# Altium PCB PCB_all_try.PcbDoc (part 4 of 5)
Units mm, origin at the board's own origin, x right, y up, seen from the top; angles counter-clockwise.
Board outline 345 x 240 mm, 2 copper layers (Top Layer, Bottom Layer); 484 components, 419 nets, 1569 pads, 699 vias.
Unrouted connection lines stored in the file: 63.
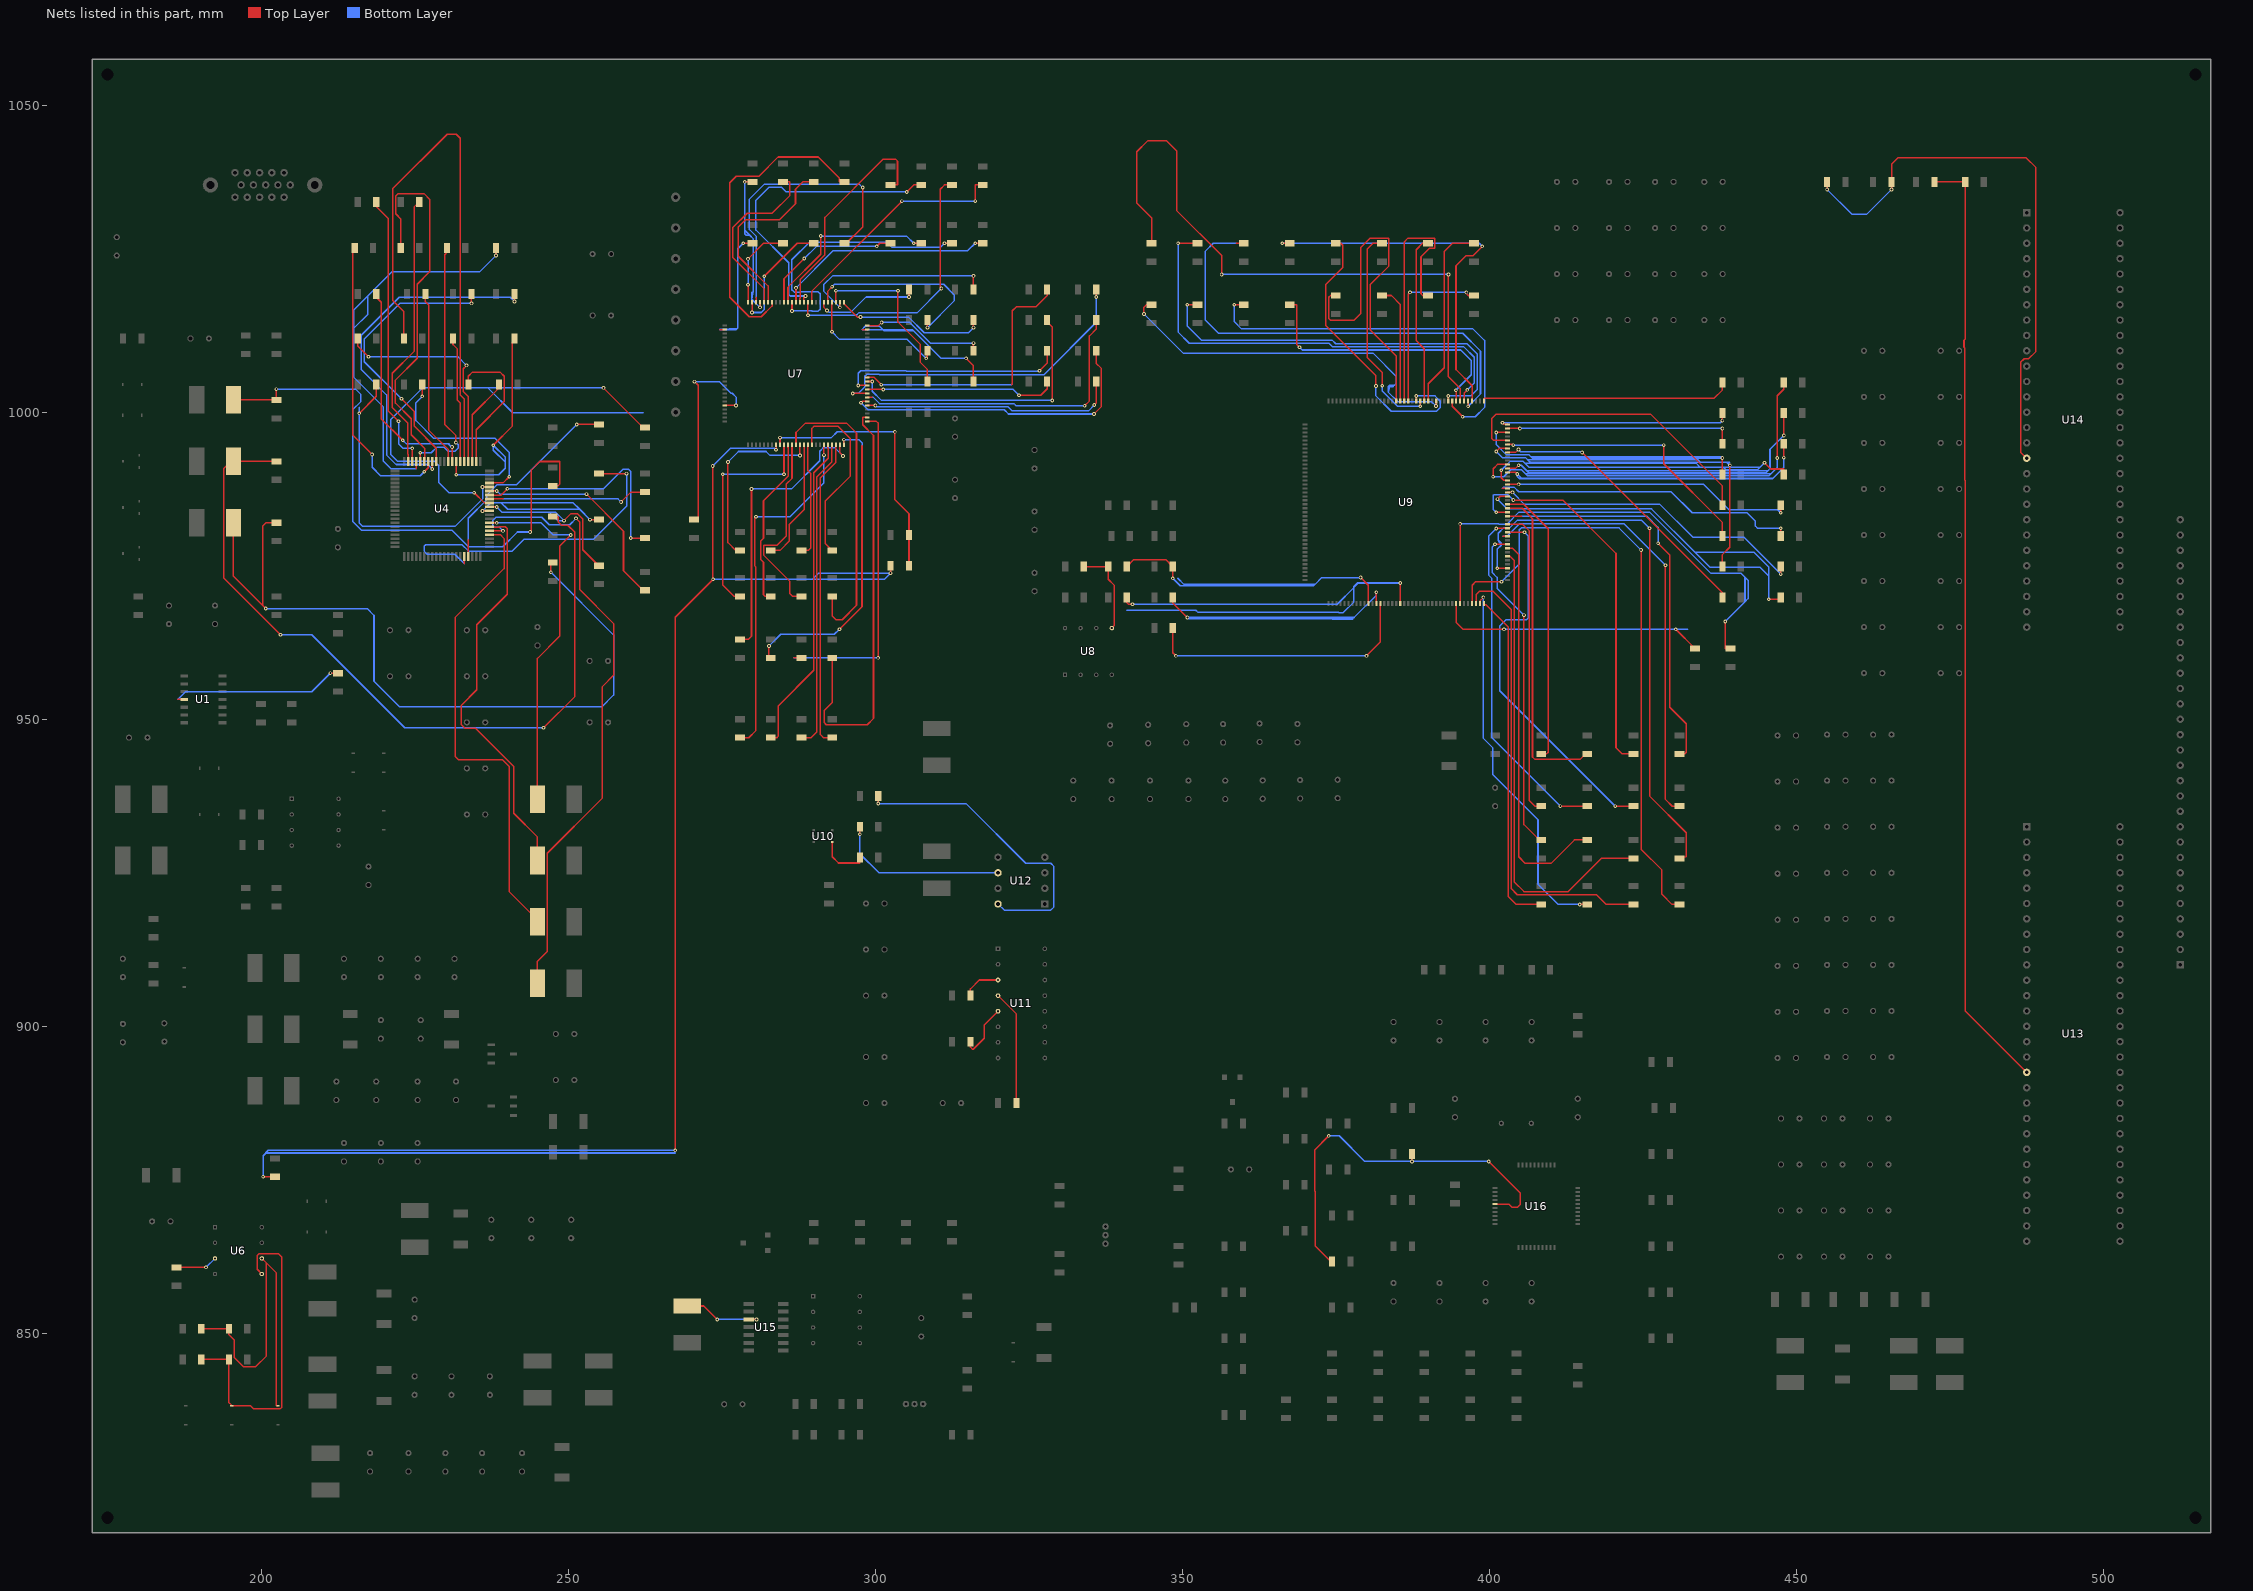
[diagram p4: the nets of this part, all layers, seen from the top]

## Via types
v1: diameter 0.6, hole 0.3, Top Layer to Bottom Layer, 699 vias

## Nets (pads, with @x,y where several pads share a name; then routed paths per layer and width w, separated by ;. In a path a pad name is that pad's centre, name@x,y a point inside that pad or via, vN(x,y) a via of type N, cw(c..) or ccw(c..) an arc to the next point about the centre after c; other vN are vias at no path point) (continued)
NetL4_2: L4.2 R15.2 R19.1 | length 96
  Top Layer w0.25: L4.2@195.5,1002 R15.2@202.489,1002 ; v1(202.489,1003.757) R15.2@202.489,1002 ; R15.2@202.5,1002 R15.2@202.489,1002 ; v1(243.815,980.491) 244.018,980.694 244.018,990.6 245.389,991.972 248.641,991.972 248.641,988.314 248.327,988 R19.1@247.5,988
  Bottom Layer w0.25: v1(202.489,1003.757) 215.392,1003.757 216.256,1002.894 216.256,1001.751 214.935,1000.43 214.935,982.218 216.408,980.745 231.14,980.745 233.782,978.103 239.344,978.103 241.732,980.491 v1(243.815,980.491)
NetL5_2: L5.2 R16.2 R20.1 | length 128.2
  Top Layer w0.25: R16.2@202.5,992 L5.2@195.5,992 195.072,992 193.904,990.832 193.904,972.998 v1(203.149,963.752) ; v1(245.999,948.614) 251.104,953.719 251.104,980.44 249.936,981.608 248.92,981.608 248.361,982.167 248.361,983 R20.1@247.5,983
  Bottom Layer w0.25: v1(203.149,963.752) 208.255,963.752 223.393,948.614 v1(245.999,948.614)
NetL6_2: L6.2 R17.2 R21.1 | length 128
  Top Layer w0.25: L6.2@195.5,982 195.5,973.281 200.254,968.527 ; v1(200.762,968.019) 200.254,968.527 ; R17.2@202.5,982 200.798,982 200.254,981.456 200.254,968.527 ; v1(247.193,973.938) 247.193,975.5 R21.1@247.5,975.5
  Bottom Layer w0.25: v1(200.762,968.019) 217.272,968.019 218.389,966.902 218.389,956.179 222.525,952.043 255.499,952.043 257.404,953.948 257.404,963.727 v1(247.193,973.938)
NetL8_1: L8.1 U4.67 | length 59.3
  Top Layer w0.25: U4.67@237.222,981.975 v1(238.379,981.975) ; L8.1@245,937 245,959.908 248.641,963.549 248.641,978.23 v1(250.419,980.008)
  Bottom Layer w0.25: v1(238.379,981.975) 245.612,981.975 247.579,980.008 v1(250.419,980.008)
NetL9_1: L9.1 U4.66 | length 66.3
  Top Layer w0.25: U4.66@237.222,981.325 237.795,981.325 237.842,981.278 238.76,981.278 238.836,981.354 239.776,981.354 240.081,981.05 240.081,970.356 235.102,965.378 235.102,954.786 232.613,952.297 232.613,949.122 233.172,948.563 234.874,948.563 241.148,942.289 241.148,934.686 245,930.834 L9.1@245,927
NetL10_1: L10.1 U4.64 | length 78.1
  Top Layer w0.25: U4.64@237.222,980.025 238.972,980.025 239.573,979.424 239.573,974.547 231.597,966.572 231.597,943.966 232.18,943.383 239.341,943.383 240.386,942.338 240.386,921.935 245,917.321 L10.1@245,917
NetL11_1: L11.1 U4.65 | length 103.1
  Top Layer w0.25: U4.65@237.222,980.675 v1(239.389,980.675) ; L11.1@245,907 245,910.582 246.583,912.165 246.583,928.167 255.524,937.108 255.524,955.27 257.404,957.15 257.404,965.581 251.877,971.107 251.877,982.122 v1(251.29,982.709)
  Bottom Layer w0.25: v1(239.389,980.675) 238.768,981.296 237.998,981.296 237.7,981.594 237.7,982.326 238.252,982.878 245.717,982.878 246.933,981.663 250.244,981.663 v1(251.29,982.709)
NetL24_2: L24.2 U15.3 | length 13.4
  Top Layer w0.25: L24.2@269.4,854.46 272.081,854.46 v1(274.269,852.272) ; U15.3@279.4,852.27 280.668,852.27 v1(280.67,852.272)
  Bottom Layer w0.25: v1(274.269,852.272) v1(280.67,852.272)
NetR11_1: R11.1 U1.4 | length 30.7
  Top Layer w0.25: 186.443,953.23 U1.4@187.5,953.23 ; v1(211.277,957.504) 211.281,957.5 R11.1@212.5,957.5
  Bottom Layer w0.25: 186.436,953.237 187.681,954.481 187.694,954.481 ; 186.443,953.23 187.694,954.481 ; v1(211.277,957.504) 208.255,954.481 187.694,954.481
NetR23_2: R23.2 U4.57 | length 37.8
  Top Layer w0.25: U4.57@233.725,976.528 233.725,979.19 ; v1(251.409,998) R23.2@255,998
  Bottom Layer w0.25: 233.725,979.19 233.725,982.72 233.731,982.726 ; 233.731,979.195 233.731,982.726 ; v1(251.409,998) 241.615,988.206 238.448,988.206 236.779,986.536 236.779,985.774 233.731,982.726
NetR24_2: R24.2 U4.56 | length 57.8
  Top Layer w0.25: 233.075,975.365 U4.56@233.075,976.528 ; R24.2@255,990 v1(259.512,990)
  Bottom Layer w0.25: 233.07,975.36 231.546,976.884 ; 233.075,975.365 231.556,976.884 231.546,976.884 ; v1(259.512,990) 259.512,984.682 254.147,979.317 242.818,979.317 240.894,977.392 233.756,977.392 232.715,978.433 226.822,978.433 226.543,978.154 226.543,977.392 227.051,976.884 231.546,976.884
NetR25_1: R25.1 U4.70 | length 35.1
  Top Layer w0.25: v1(236.068,983.925) U4.70@237.222,983.925 ; v1(253.564,982.5) R25.1@255,982.5
  Bottom Layer w0.25: v1(236.068,983.925) 237.409,985.266 239.065,985.266 ; v1(253.564,982.5) 251.881,984.183 ; 239.065,985.266 250.798,985.266 251.881,984.183 ; 239.065,985.266 240.148,984.183 251.881,984.183
NetR26_1: R26.1 U4.71 | length 28.5
  Top Layer w0.25: U4.71@237.222,984.575 v1(238.379,984.575) ; v1(249.326,982.345) 250.469,983.488 251.485,983.488 252.381,982.592 252.381,977.619 R26.1@255,975
  Bottom Layer w0.25: v1(238.379,984.575) 239.275,983.679 246.964,983.679 ; 246.964,983.679 247.992,983.679 v1(249.326,982.345) 248.298,982.345 246.964,983.679
NetR27_1: R27.1 U4.72 | length 99.8
  Top Layer w0.25: v1(234.696,986.892) 236.363,985.225 U4.72@237.222,985.225 ; v1(255.744,1003.96) 262.204,997.5 R27.1@262.5,997.5
  Bottom Layer w0.25: v1(234.696,986.892) 230.618,986.892 228.941,988.568 228.941,991.298 228.253,991.986 222.261,991.986 221.122,993.125 221.122,998.816 226.266,1003.96 236.931,1003.96 ; v1(255.744,1003.96) 236.931,1003.96 ; 262.204,999.922 240.97,999.922 236.931,1003.96
NetR28_1: R28.1 U4.73 | length 44.9
  Top Layer w0.25: U4.73@237.222,985.875 239.395,985.875 ; v1(258.623,985.368) 260.255,987 R28.1@262.5,987
  Bottom Layer w0.25: v1(258.623,985.368) 258.115,985.875 ; 258.115,985.875 239.395,985.875 258.115,985.876
NetR29_1: R29.1 U4.74 | length 48.8
  Top Layer w0.25: U4.74@237.222,986.525 237.936,986.485 239.065,986.485 v1(240.106,987.527) ; v1(260.198,979.5) R29.1@262.5,979.5
  Bottom Layer w0.25: v1(240.106,987.527) 255.753,987.527 258.905,990.679 259.865,990.679 260.198,990.346 ; 260.198,990.346 v1(260.198,979.5) 260.198,990.346
NetR30_1: R30.1 U4.75 | length 35.8
  Top Layer w0.25: U4.75@237.222,987.175 v1(238.379,987.175) ; v1(252.983,986.663) 259.015,980.631 259.015,974.19 262.204,971 R30.1@262.5,971
  Bottom Layer w0.25: v1(238.379,987.175) 238.891,986.663 v1(252.983,986.663)
NetR31_1: R31.1 U4.76 | length 49.9
  Top Layer w0.25: v1(215.976,999.805) 218.75,1002.578 R31.1@218.75,1004.5 ; v1(236.068,987.831) 236.074,987.825 U4.76@237.222,987.825
  Bottom Layer w0.25: 215.976,1000.821 v1(215.976,999.805) 215.976,981.964 216.484,981.456 231.646,981.456 236.068,985.877 v1(236.068,987.831)
NetR32_1: R32.1 U4.77 | length 31.2
  Top Layer w0.25: v1(226.25,1002.576) R32.1@226.25,1004.5 ; U4.77@237.222,988.475 239.404,988.475 v1(240.411,989.482)
  Bottom Layer w0.25: v1(226.25,1002.576) 225.211,1001.536 225.211,998.642 228.089,995.763 238.087,995.763 240.411,993.439 v1(240.411,989.482)
NetR33_1: R33.1 U4.2 | length 23.5
  Top Layer w0.25: R33.1@233.75,1004.5 233.75,1005.84 234.436,1006.526 238.912,1006.526 239.598,1005.84 239.598,1001.725 235.025,997.152 U4.2@235.025,991.972
NetR34_1: R34.1 U4.3 | length 14.3
  Top Layer w0.25: U4.3@234.375,991.972 234.375,999.585 238.75,1003.96 R34.1@238.75,1004.5
NetR35_1: R35.1 U4.4 | length 36.4
  Top Layer w0.25: R35.1@215.75,1012 215.75,1010.768 v1(217.503,1009.015) ; v1(233.451,1007.618) 232.918,1007.085 232.918,1003.351 233.725,1002.544 U4.4@233.725,991.972
  Bottom Layer w0.25: v1(217.503,1009.015) 232.054,1009.015 v1(233.451,1007.618)
NetR36_1: R36.1 U4.5 | length 93
  Top Layer w0.25: R36.1@223.25,1012 223.25,1016.397 221.412,1018.235 221.412,1036.371 230.302,1045.261 231.775,1045.261 232.414,1044.622 232.414,1002.793 233.075,1002.132 U4.5@233.075,991.972
NetR37_1: R37.1 U4.6 | length 20.5
  Top Layer w0.25: R37.1@231.25,1012 231.25,1011.013 231.91,1010.353 231.91,1002.021 232.425,1001.506 U4.6@232.425,991.972
NetR38_1: R38.1 U4.7 | length 37.5
  Top Layer w0.25: v1(231.775,989.813) U4.7@231.775,991.972 ; v1(237.807,994.626) 240.919,997.737 240.919,1011.376 241.25,1011.707 R38.1@241.25,1012
  Bottom Layer w0.25: v1(231.775,989.813) 238.702,989.813 239.744,990.854 239.744,991.895 ; v1@237.795,994.613 v1@237.82,994.613 ; v1(237.807,994.626) v1@237.82,994.613 ; v1@237.82,994.613 239.744,992.69 239.744,991.895 ; v1@237.82,994.613 237.82,993.819 239.744,991.895
NetR39_1: R39.1 U4.8 | length 37.3
  Top Layer w0.25: R39.1@218.75,1019.25 218.75,1018.718 219.583,1017.885 219.583,998.909 v1(223.063,995.429) ; v1(231.115,994.334) 231.125,994.323 U4.8@231.125,991.972
  Bottom Layer w0.25: v1(223.063,995.429) 223.661,994.831 230.462,994.831 ; 230.462,994.831 230.617,994.831 v1(231.115,994.334) 230.96,994.334 230.462,994.831
NetR40_1: R40.1 U4.9 | length 28.8
  Top Layer w0.25: R40.1@226.75,1019.25 226.75,1018.032 227.279,1017.503 227.279,997.102 230.475,993.907 U4.9@230.475,991.972
NetR41_1: R41.1 U4.12 | length 46.2
  Top Layer w0.25: v1(222.86,1002.182) 224.963,1000.079 224.963,997.692 228.525,994.131 U4.12@228.525,991.972 ; v1(234.25,1017.714) R41.1@234.25,1019.25
  Bottom Layer w0.25: v1(222.86,1002.182) 216.814,1008.228 216.814,1011.936 222.592,1017.714 v1(234.25,1017.714)
NetR42_1: R42.1 U4.13 | length 59.8
  Top Layer w0.25: v1(227.875,990.741) U4.13@227.875,991.972 ; v1(241.25,1018.032) R42.1@241.25,1019.25
  Bottom Layer w0.25: v1(227.875,990.741) 227.134,991.482 221.977,991.482 220.431,993.029 220.431,1002.808 216.306,1006.932 216.306,1012.52 222.504,1018.718 240.564,1018.718 v1(241.25,1018.032)
NetR43_1: R43.1 U4.14 | length 48.6
  Top Layer w0.25: R43.1@215.25,1026.75 215.25,1026.439 214.909,1026.439 214.909,996.29 v1(218.084,993.115) ; v1(226.575,990.306) 227.225,990.956 U4.14@227.225,991.972
  Bottom Layer w0.25: v1(218.084,993.115) 218.084,991.032 219.456,989.66 225.93,989.66 v1(226.575,990.306)
NetR44_1: R44.1 U4.15 | length 61.9
  Top Layer w0.25: R44.1@222.75,1026.75 222.75,1031.477 221.92,1032.307 221.92,1035.202 222.25,1035.533 226.593,1035.533 227.483,1034.643 227.483,1022.909 225.425,1020.851 225.425,1008.786 221.876,1005.237 221.876,1001.49 224.434,998.931 224.434,996.315 226.619,994.131 226.619,992.226 226.575,992.226 U4.15@226.575,991.972
NetR45_1: R45.1 U4.16 | length 42.1
  Top Layer w0.25: U4.16@225.925,991.972 v1(225.925,993.394) ; R45.1@230.25,1026.75 230.25,1025.982 229.921,1025.653 229.921,997.991 231.724,996.188 v1(231.724,995.07)
  Bottom Layer w0.25: v1(225.925,993.394) 227.718,993.394 228.651,994.327 229.75,994.327 230.429,993.648 231.597,993.648 232.105,994.156 232.105,994.689 v1(231.724,995.07)
NetR46_1: R46.1 U4.17 | length 72.2
  Top Layer w0.25: 225.275,990.806 U4.17@225.275,991.972 ; v1(238.25,1025.525) R46.1@238.25,1026.75
  Bottom Layer w0.25: 225.273,990.803 221.138,990.803 221.136,990.806 ; 225.275,990.806 221.136,990.806 ; v1(238.25,1025.525) 235.558,1022.833 221.281,1022.833 217.399,1018.95 ; 215.062,1013.612 215.062,1016.613 217.399,1018.95 ; 215.062,1013.612 217.399,1015.949 217.399,1018.95 ; 215.062,1013.612 215.062,1005.71 219.927,1000.845 219.927,992.014 221.136,990.806
NetR47_1: R47.1 U4.18 | length 45.6
  Top Layer w0.25: R47.1@218.75,1034.25 218.75,1033.475 220.701,1031.525 220.701,1000.201 v1(222.384,998.518) ; U4.18@224.625,991.972 v1(224.625,994.105)
  Bottom Layer w0.25: v1(222.384,998.518) 222.384,994.86 223.139,994.105 v1(224.625,994.105)
NetR48_1: R48.1 U4.19 | length 45.2
  Top Layer w0.25: U4.19@223.975,991.972 223.975,993.117 223.85,993.242 223.85,998.282 221.372,1000.76 221.372,1006.355 224.921,1009.904 224.921,1033.408 225.75,1034.237 R48.1@225.75,1034.25
NetR49_2: R49.2 U6.3 | length 6.9
  Top Layer w0.25: R49.2@186.25,860.75 v1(191.04,860.75)
  Bottom Layer w0.25: v1(191.04,860.75) U6.3@192.5,862.21
NetR50_1: R50.1 R52.2 U6.6 ZD7.2 | length 56.5
  Top Layer w0.25: R50.1@190.25,850.75 R52.2@194.75,850.75 194.75,849.8 195.605,848.944 195.605,846.099 197.104,844.601 199.136,844.601 200.863,846.328 200.863,861.467 ; U6.6@200.12,862.21 200.863,861.467 ; ZD7.2@202.75,838.25 202.438,838.25 202.438,859.892 200.863,861.467
NetR51_1: R51.1 R53.2 U6.5 ZD8.2 | length 52.8
  Top Layer w0.25: R51.1@190.25,845.75 R53.2@194.75,845.75 194.75,838.75 ZD8.2@195.25,838.25 198.248,838.25 198.806,837.692 203.098,837.692 203.352,837.946 203.352,862.432 202.819,862.965 199.644,862.965 199.365,862.686 199.365,860.425 U6.5@200.12,859.67
NetR54_1: R54.1 U7.77 | length 22.3
  Top Layer w0.25: 274.726,1013.45 U7.77@275.5,1013.45 ; v1(278.511,1027.5) R54.1@280,1027.5
  Bottom Layer w0.25: 274.712,1013.463 274.739,1013.463 ; 274.726,1013.45 274.739,1013.463 ; v1(278.511,1027.5) 277.607,1026.596 277.607,1013.703 ; 274.739,1013.463 277.368,1013.463 277.607,1013.703 ; 274.739,1013.463 277.607,1013.703
NetR55_1: R55.1 U7.75 | length 13.8
  Top Layer w0.25: v1(279.298,1024.966) 281.832,1027.5 R55.1@285,1027.5 ; U7.75@279.3,1017.9 v1(279.3,1020.75)
  Bottom Layer w0.25: v1(279.298,1024.966) 279.298,1020.751 v1(279.3,1020.75)
NetR56_1: R56.1 R62.2 U7.8 | length 310.3
  Top Layer w0.25: v1(200.33,875.5) R56.1@202.25,875.5 ; v1(267.437,879.805) 267.437,966.622 v1@273.533,972.718 ; v1(273.533,991.235) v1@273.533,972.718 ; v1(273.609,972.795) v1@273.533,972.718 ; v1(283.85,993.873) U7.8@283.85,994.7 ; v1(302.5,973.797) R62.2@302.5,975
  Bottom Layer w0.25: v1(200.33,875.5) 200.33,878.84 ; 267.437,879.373 200.863,879.373 200.33,878.84 ; v1(267.437,879.805) 201.168,879.805 200.33,878.967 200.33,878.84 ; v1(273.533,991.235) 276.421,994.123 283.6,994.123 v1(283.85,993.873) ; v1(273.609,972.795) 289.79,972.795 ; v1(302.5,973.797) v1@302.489,973.785 ; 289.79,972.795 301.498,972.795 v1@302.489,973.785 ; 289.79,972.795 290.781,973.785 v1@302.489,973.785
NetR57_1: R57.1 R62.1 U7.9 | length 43
  Top Layer w0.25: U7.9@284.5,994.7 v1(284.5,995.858) ; v1(303.2,996.798) 303.2,985.764 305.5,983.464 R57.1@305.5,980 R62.1@305.5,975
  Bottom Layer w0.25: v1(284.5,995.858) 292.871,995.858 293.811,996.798 v1(303.2,996.798)
NetR58_1: R58.1 U7.74 | length 19.5
  Top Layer w0.25: v1(279.95,1016.236) U7.74@279.95,1017.9 ; v1(281.94,1022.147) 287.293,1027.5 R58.1@290,1027.5
  Bottom Layer w0.25: v1(279.95,1016.236) 281.439,1016.236 281.94,1016.737 v1(281.94,1022.147)
NetR59_2: R59.2 U7.96 | length 34.4
  Top Layer w0.25: R59.2@270.5,982.5 271.17,982.5 271.17,1004.392 v1(270.586,1004.976) ; U7.96@275.5,1001.1 277.333,1001.1 v1(277.343,1001.09)
  Bottom Layer w0.25: v1(270.586,1004.976) 274.599,1004.976 276.504,1003.071 276.733,1003.071 277.343,1002.462 v1(277.343,1001.09)
NetR60_1: R60.1 U7.73 | length 47.5
  Top Layer w0.25: U7.73@280.6,1017.9 280.6,1018.712 ; R60.1@295,1027.5 295.3,1027.5 297.967,1030.167 v1(297.967,1036.574)
  Bottom Layer w0.25: 280.6,1018.712 280.594,1018.718 280.594,1019.251 280.666,1019.323 280.666,1028.591 279.514,1029.744 279.514,1034.711 281.9,1037.097 297.445,1037.097 v1(297.967,1036.574)
NetR61_1: R61.1 U7.72 | length 26.5
  Top Layer w0.25: v1(278.765,1037.5) R61.1@280,1037.5 ; v1(281.25,1017.067) U7.72@281.25,1017.9
  Bottom Layer w0.25: v1(278.765,1037.5) 278.765,1029.618 ; v1(281.25,1017.067) 279.908,1018.409 ; 278.765,1029.618 278.765,1029.075 279.01,1028.83 279.554,1028.83 ; 278.765,1029.618 279.554,1028.83 ; 279.554,1028.83 280.162,1028.221 280.162,1019.734 ; 279.908,1018.409 280.162,1019.734 ; 279.908,1018.409 279.908,1019.48 280.162,1019.734
NetR63_1: R63.1 U7.71 | length 29
  Top Layer w0.25: U7.71@281.9,1017.9 281.9,1020.129 276.82,1025.209 276.82,1030.057 279.146,1032.383 283.185,1032.383 286.106,1035.304 286.106,1037.5 R63.1@285,1037.5
NetR64_1: R64.1 U7.70 | length 31
  Top Layer w0.25: U7.70@282.55,1017.9 282.55,1020.546 277.698,1025.398 277.698,1030.173 278.867,1031.342 284.404,1031.342 287.02,1033.958 287.02,1036.32 288.2,1037.5 R64.1@290,1037.5
NetR65_1: R65.1 U7.69 | length 50.7
  Top Layer w0.25: U7.69@283.2,1017.9 283.2,1017.285 281.457,1015.543 279.476,1015.543 276.301,1018.718 276.301,1037.361 277.368,1038.428 281.064,1038.428 284.188,1041.552 290.728,1041.552 294.132,1038.149 294.132,1037.5 R65.1@295,1037.5
NetR66_1: R66.1 U7.17 | length 30.3
  Top Layer w0.25: U7.17@289.7,994.7 289.7,997.363 290.068,997.731 293.91,997.731 295.961,995.68 295.961,989.609 291.871,985.52 291.871,978.629 R66.1@293,977.5
NetR67_1: R67.1 U7.16 | length 18.7
  Top Layer w0.25: R67.1@288,977.5 289.092,977.5 289.492,977.9 289.492,990.024 288.983,990.534 288.983,993.362 289.05,993.429 U7.16@289.05,994.7
NetR68_1: R68.1 U7.15 | length 20.3
  Top Layer w0.25: R68.1@283,977.5 284.48,977.5 286.032,979.052 286.032,981.763 288.442,984.174 288.442,994.444 U7.15@288.4,994.7
NetR69_1: R69.1 U7.14 | length 30.1
  Top Layer w0.25: v1(276.022,991.895) 276.022,978.764 277.285,977.5 R69.1@278,977.5 ; v1(287.75,992.962) U7.14@287.75,994.7
  Bottom Layer w0.25: v1(276.022,991.895) 277.724,993.597 282.219,993.597 282.854,992.962 v1(287.75,992.962)
NetR70_1: R70.1 U7.13 | length 49.6
  Top Layer w0.25: U7.13@287.1,994.7 287.1,996.696 288.639,998.235 295.312,998.235 296.951,996.595 296.951,968.547 294.621,966.216 293.605,966.216 292.989,966.832 292.989,970 R70.1@293,970
NetR71_1: R71.1 U7.12 | length 31.2
  Top Layer w0.25: U7.12@286.45,994.7 286.45,989.217 285.524,988.291 285.524,979.83 284.025,978.332 281.875,978.332 281.875,976.675 286.055,972.495 286.055,970.509 286.563,970 R71.1@288,970
NetR72_1: R72.1 U7.11 | length 27.8
  Top Layer w0.25: R72.1@283,970 282.093,970 281.813,970.28 281.813,975.553 281.371,975.995 281.371,979.021 281.813,979.463 281.813,985.571 285.877,989.635 285.877,994.155 285.8,994.232 U7.11@285.8,994.7
NetR73_1: R73.1 U7.10 | length 36.4
  Top Layer w0.25: v1(275.184,989.889) 275.184,971.88 277.064,970 R73.1@278,970 ; v1(285.15,989.889) U7.10@285.15,994.7
  Bottom Layer w0.25: v1(275.184,989.889) v1(285.15,989.889)
NetR74_1: R74.1 U7.66 | length 23.6
  Top Layer w0.25: U7.66@285.15,1017.9 285.15,1021.725 v1(288.442,1025.017) ; v1(300.253,1026.998) 300.755,1027.5 R74.1@302.5,1027.5
  Bottom Layer w0.25: v1(288.442,1025.017) 290.424,1026.998 v1(300.253,1026.998)
NetR75_1: R75.1 U7.65 | length 29.8
  Top Layer w0.25: U7.65@285.8,1017.9 285.8,1020.368 291.135,1025.703 v1(291.135,1028.683) ; v1(306.273,1027.506) 306.279,1027.5 R75.1@307.5,1027.5
  Bottom Layer w0.25: v1(291.135,1028.683) 305.096,1028.683 v1(306.273,1027.506)
NetR76_1: R76.1 U7.64 | length 46.4
  Top Layer w0.25: v1(286.45,1016.483) U7.64@286.45,1017.9 ; v1(311.277,1027.506) 311.283,1027.5 R76.1@312.5,1027.5
  Bottom Layer w0.25: v1(286.45,1016.483) 289.712,1016.483 289.763,1016.432 290.703,1016.432 291.033,1016.762 291.033,1019.277 290.703,1019.607 287.833,1019.607 287.782,1019.556 286.817,1019.556 286.421,1019.952 286.421,1024.824 289.281,1027.684 301.854,1027.684 302.717,1026.82 310.591,1026.82 v1(311.277,1027.506)
NetR77_1: R77.1 U7.63 | length 35.8
  Top Layer w0.25: U7.63@287.1,1017.9 v1(287.1,1020.242) ; v1(316.281,1027.506) 316.287,1027.5 R77.1@317.5,1027.5
  Bottom Layer w0.25: v1(287.1,1020.242) 293.171,1026.312 315.087,1026.312 v1(316.281,1027.506)
NetR78_1: R78.1 U7.62 | length 36.4
  Top Layer w0.25: U7.62@287.75,1017.9 287.75,1018.584 287.782,1018.616 287.782,1021.588 291.821,1025.627 291.821,1031.723 301.311,1041.213 303.31,1041.213 303.632,1040.892 303.632,1037 R78.1@302.5,1037
NetR79_1: R79.1 U7.61 | length 50.1
  Top Layer w0.25: U7.61@288.4,1017.9 288.4,1018.675 v1(288.646,1018.921) ; v1(305.136,1035.863) 306.273,1037 R79.1@307.5,1037
  Bottom Layer w0.25: v1(288.646,1018.921) 286.142,1018.921 285.917,1019.146 285.917,1024.325 280.581,1029.661 280.581,1034.497 282.677,1036.593 284.778,1036.593 285.508,1035.863 v1(305.136,1035.863)
NetR80_1: R80.1 U7.60 | length 44.1
  Top Layer w0.25: v1(289.05,1015.79) U7.60@289.05,1017.9 ; v1(310.769,1020.14) 310.591,1020.318 310.591,1036.32 311.271,1037 R80.1@312.5,1037
  Bottom Layer w0.25: v1(289.05,1015.79) 296.92,1015.79 297.294,1016.164 306.793,1016.164 v1(310.769,1020.14)
NetR81_1: R81.1 U7.59 | length 38.3
  Top Layer w0.25: U7.59@289.7,1017.9 289.7,1019.721 v1(304.343,1034.364) ; v1(316.281,1034.364) 316.281,1037 R81.1@317.5,1037
  Bottom Layer w0.25: v1(304.343,1034.364) v1(316.281,1034.364)
NetR82_1: R82.1 U7.27 | length 70.2
  Top Layer w0.25: R82.1@293,960 293.014,960 293.014,952.745 291.694,951.425 291.694,949.452 292.024,949.122 298.704,949.122 299.72,950.138 299.72,996.214 297.967,997.967 297.967,999.15 U7.27@298.7,999.15
NetR83_1: R83.1 U7.26 | length 55.1
  Top Layer w0.25: 286.773,960 R83.1@288,960 ; U7.26@298.7,998.5 300.203,998.5 300.482,998.221 v1(300.482,959.993)
  Bottom Layer w0.25: 286.773,960 286.766,959.993 v1(300.482,959.993)
NetR84_1: R84.1 U7.25 | length 50.7
  Top Layer w0.25: v1(282.702,961.923) 282.702,960 R84.1@283,960 ; v1(294.183,964.667) 297.851,968.335 297.851,994.497 ; U7.25@294.9,994.7 v1(294.9,995.528)
  Bottom Layer w0.25: v1(282.702,961.923) 284.607,963.828 293.345,963.828 v1(294.183,964.667) ; v1(294.9,995.528) 297.358,995.528 297.866,995.02 297.866,994.512 297.851,994.497
NetR85_1: R85.1 U7.24 | length 47.2
  Top Layer w0.25: R85.1@278,963 279.324,963 279.857,963.533 v1(279.857,987.501) ; U7.24@294.25,994.7 294.25,993.378 v1(294.767,992.861)
  Bottom Layer w0.25: v1(279.857,987.501) 286.353,987.501 290.957,992.105 290.957,993.648 291.484,994.175 293.453,994.175 v1(294.767,992.861)
NetR86_1: R86.1 U7.23 | length 50.4
  Top Layer w0.25: R86.1@293,947 291.592,947 291.084,947.508 291.084,989.329 293.6,991.845 U7.23@293.6,994.7
NetR87_1: R87.1 U7.22 | length 50.7
  Top Layer w0.25: R87.1@288,947 289.56,947 290.509,947.949 290.509,989.484 292.95,991.925 U7.22@292.95,994.7
NetR88_1: R88.1 U7.21 | length 52.2
  Top Layer w0.25: R88.1@283,947 283.984,947 284.236,947.252 284.236,952.205 290.005,957.974 290.005,990.144 292.354,992.493 292.354,994.102 292.3,994.156 U7.21@292.3,994.7
NetR89_1: R89.1 U7.20 | length 57.6
  Top Layer w0.25: R89.1@278,947 279.4,947 280.579,948.179 280.579,974.77 280.363,974.987 280.363,982.749 v1(280.59,982.976) ; v1(291.65,993.012) U7.20@291.65,994.7
  Bottom Layer w0.25: v1(280.59,982.976) 286.127,982.976 291.65,988.499 v1(291.65,993.012)
NetR90_1: R90.1 U7.56 | length 17.3
  Top Layer w0.25: U7.56@291.65,1017.9 291.65,1017.06 v1(292.151,1016.559) ; v1(305.5,1018.757) R90.1@305.5,1020
  Bottom Layer w0.25: v1(292.151,1016.559) 292.416,1016.294 296.042,1016.294 298.505,1018.757 v1(305.5,1018.757)
NetR91_1: R91.1 U7.55 | length 31.9
  Top Layer w0.25: U7.55@292.3,1017.9 292.3,1019.731 v1(292.989,1020.42) ; v1(308.5,1013.765) R91.1@308.5,1015
  Bottom Layer w0.25: v1(292.989,1020.42) 293.389,1020.819 311.157,1020.819 312.852,1019.124 312.852,1018.117 v1(308.5,1013.765)
NetR92_1: R92.1 U7.54 | length 23.3
  Top Layer w0.25: v1(292.95,1013.104) U7.54@292.95,1017.9 ; v1(308.305,1008.761) 308.5,1008.956 R92.1@308.5,1010
  Bottom Layer w0.25: v1(292.95,1013.104) 294.203,1011.852 305.214,1011.852 v1(308.305,1008.761)
NetR93_1: R93.1 U7.53 | length 28.8
  Top Layer w0.25: U7.53@293.6,1017.9 v1(293.6,1019.785) ; v1(303.708,1019.785) 303.708,1014.679 307.357,1011.03 307.357,1008.103 308.5,1006.96 R93.1@308.5,1005
  Bottom Layer w0.25: v1(293.6,1019.785) v1(303.708,1019.785)
NetR94_1: R94.1 U7.52 | length 32.8
  Top Layer w0.25: v1(294.25,1017.067) U7.52@294.25,1017.9 ; R94.1@316,1020 v1(316,1022.198)
  Bottom Layer w0.25: v1(294.25,1017.067) 291.592,1019.725 291.592,1020.741 293.049,1022.198 v1(316,1022.198)
NetR95_1: R95.1 U7.51 | length 24.9
  Top Layer w0.25: U7.51@294.9,1017.9 294.9,1017.676 297.091,1015.485 v1(297.599,1015.485) ; v1(316,1013.765) R95.1@316,1015
  Bottom Layer w0.25: v1(297.599,1015.485) 305.442,1015.485 307.975,1012.952 315.187,1012.952 v1(316,1013.765)
NetR96_1: R96.1 U7.50 | length 20.1
  Top Layer w0.25: U7.50@298.7,1014.1 300.533,1014.1 v1(301.041,1014.608) ; R96.1@316,1010 v1(316,1011.245)
  Bottom Layer w0.25: v1(301.041,1014.608) 305.606,1014.608 308.969,1011.245 v1(316,1011.245)
NetR97_1: R97.1 U7.49 | length 32.8
  Top Layer w0.25: 297.876,1013.45 U7.49@298.7,1013.45 ; v1(314.808,1008.761) 316,1007.569 R97.1@316,1005
  Bottom Layer w0.25: 297.866,1013.46 298.384,1013.978 300.713,1013.978 301.241,1013.45 ; 297.876,1013.45 301.241,1013.45 ; v1(314.808,1008.761) 310.74,1008.761 306.198,1013.304 ; 301.241,1013.45 306.051,1013.45 306.198,1013.304 ; 301.241,1013.45 301.387,1013.304 306.198,1013.304
NetR100_1: R100.1 U7.37 | length 44
  Top Layer w0.25: U7.37@298.7,1005.65 298.679,1005.65 298.679,1005.688 299.796,1005.688 v1(300.99,1004.494) ; 322.224,1004.494 322.326,1004.595 322.326,1016.508 322.961,1017.143 326.136,1017.143 328,1019.007 R100.1@328,1020
  Bottom Layer w0.25: v1(300.99,1004.494) 322.224,1004.494 322.326,1004.595
NetR101_1: R101.1 U7.36 | length 45.8
  Top Layer w0.25: U7.36@298.7,1005 v1(299.517,1005) ; R101.1@328,1015 328,1014.705 328.828,1013.876 v1(328.828,1001.91)
  Bottom Layer w0.25: v1(299.517,1005) 299.517,1003.402 301.008,1001.91 v1(328.828,1001.91)
NetR102_1: R102.1 U7.35 | length 37
  Top Layer w0.25: v1(297.231,1004.35) U7.35@298.7,1004.35 ; v1(326.746,1006.754) 328,1008.009 R102.1@328,1010
  Bottom Layer w0.25: v1(297.231,1004.35) 297.231,1006.348 297.637,1006.754 304.985,1006.754 305.105,1006.634 326.625,1006.634 v1(326.746,1006.754)
NetR103_1: R103.1 U7.34 | length 31.3
  Top Layer w0.25: U7.34@298.7,1003.7 v1(301.311,1003.7) ; v1(323.427,1002.767) 326.959,1002.767 328,1003.808 R103.1@328,1005
  Bottom Layer w0.25: v1(301.311,1003.7) 322.494,1003.7 v1(323.427,1002.767)
NetR104_1: R104.1 U7.33 | length 53.3
  Top Layer w0.25: v1(296.342,1003.05) U7.33@298.7,1003.05 ; v1(336,1018.769) R104.1@336,1020
  Bottom Layer w0.25: v1(296.342,1003.05) 297.248,1003.05 298.306,1004.109 298.306,1005.84 298.662,1006.196 300.634,1006.196 300.755,1006.075 327.431,1006.075 336,1014.644 v1(336,1018.769)
NetR105_1: R105.1 U7.32 | length 50.9
  Top Layer w0.25: U7.32@298.7,1002.4 299.506,1002.4 ; v1(334.096,1001.058) 334.874,1001.836 334.874,1012.41 336,1013.536 R105.1@336,1015
  Bottom Layer w0.25: 299.506,1002.4 299.706,1002.4 ; 299.517,1002.411 299.695,1002.411 299.706,1002.4 ; v1(334.096,1001.058) 322.941,1001.058 322.596,1001.404 300.702,1001.404 299.706,1002.4
NetR106_1: R106.1 U7.31 | length 50.9
  Top Layer w0.25: v1(297.688,1001.547) 297.891,1001.75 U7.31@298.7,1001.75 ; v1(335.621,999.704) 336.829,1000.912 336.829,1007.093 336,1007.922 R106.1@336,1010
  Bottom Layer w0.25: v1(297.688,1001.547) 298.84,1000.396 321.01,1000.396 321.701,999.704 v1(335.621,999.704)
NetR107_1: R107.1 U7.30 | length 41.7
  Top Layer w0.25: U7.30@298.7,1001.1 v1(300.025,1001.1) ; v1(335.667,1001.157) 336,1001.489 R107.1@336,1005
  Bottom Layer w0.25: v1(300.025,1001.1) 300.225,1000.9 321.616,1000.9 322.308,1000.208 334.718,1000.208 v1(335.667,1001.157)
NetR111_2: R111.2 R117.2 U8.5 | length 14.5
  Top Layer w0.25: R111.2@333.95,974.85 R117.2@337.95,974.85 337.95,972.795 338.887,971.858 338.887,965.207 U8.5@338.53,964.85
NetR113_1: R113.1 R117.1 U9.11 | length 69.5
  Top Layer w0.25: R117.1@340.95,974.85 342.095,975.995 347.305,975.995 R113.1@348.45,974.85 v1(348.45,972.947) ; v1(379.044,973.074) 380.3,971.818 U9.11@380.3,968.85
  Bottom Layer w0.25: v1(348.45,972.947) 349.658,971.739 371.384,971.739 371.602,971.956 ; 349.275,972.947 350.266,971.956 371.602,971.956 ; v1(379.044,973.074) 372.72,973.074 371.602,971.956
NetR114_1: R114.1 U9.13 | length 66.2
  Top Layer w0.25: R114.1@348.45,969.85 348.45,968.949 v1(350.828,966.572) ; U9.13@381.6,968.85 381.6,970.677 v1(381.61,970.686)
  Bottom Layer w0.25: v1(381.61,970.686) 381.61,970.204 377.977,966.572 ; 377.977,966.572 377.723,966.318 374.455,966.318 374.389,966.384 351.015,966.384 v1(350.828,966.572) 377.977,966.572
NetR115_1: R115.1 U9.14 | length 45.2
  Top Layer w0.25: R115.1@348.45,964.85 348.45,960.831 v1(348.958,960.323) ; v1(380.009,960.323) 382.25,962.564 U9.14@382.25,968.85
  Bottom Layer w0.25: v1(348.958,960.323) v1(380.009,960.323)
NetR118_1: R118.1 U9.19 | length 91.7
  Top Layer w0.25: R118.1@340.95,969.85 340.95,969.01 341.229,968.731 v1(341.909,968.731) ; v1(385.496,972.185) 385.5,972.181 U9.19@385.5,968.85
  Bottom Layer w0.25: 340.95,967.755 352.198,967.755 352.561,967.392 375.463,967.392 375.522,967.334 376.174,967.334 377.952,969.112 377.952,971.448 ; v1(341.909,968.731) 375.234,968.731 377.952,971.448 ; v1@385.5,972.185 v1(385.496,972.185) 378.689,972.185 ; 377.952,971.448 377.952,971.677 378.46,972.185 378.689,972.185 ; 377.952,971.448 378.689,972.185
NetR119_2: R119.2 U9.103 | length 56
  Top Layer w0.25: R119.2@375,1019 374.142,1019 373.863,1018.721 373.863,1015.238 374.117,1014.984 377.977,1014.984 379.095,1016.102 379.095,1026.846 380.594,1028.344 383.642,1028.344 383.642,1023.823 380.594,1020.776 380.594,1013.401 384.85,1009.145 U9.103@384.85,1001.8
NetR120_2: R120.2 U9.102 | length 19.3
  Top Layer w0.25: R120.2@382.5,1019 384.048,1019 385.5,1017.548 U9.102@385.5,1001.8
NetR121_2: R121.2 U9.101 | length 43
  Top Layer w0.25: U9.101@386.15,1001.8 386.15,1027.729 386.766,1028.344 391.135,1028.344 391.135,1026.668 390.22,1026.668 388.874,1025.322 388.874,1019.254 389.128,1019 R121.2@390,1019
NetR122_2: R122.2 U9.100 | length 28.6
  Top Layer w0.25: U9.100@386.8,1001.8 386.8,1019.209 v1(387.096,1019.505) ; v1(396.265,1019.505) 396.265,1019.302 396.567,1019 R122.2@397.5,1019
  Bottom Layer w0.25: v1(387.096,1019.505) v1(396.265,1019.505)
NetR123_2: R123.2 U9.98 | length 48.3
  Top Layer w0.25: R123.2@375,1027.5 375.825,1027.5 376.149,1027.176 376.149,1023.569 373.355,1020.775 373.355,1014.118 381.533,1005.939 v1(381.533,1004.256) ; U9.98@388.1,1001.8 388.1,1002.628 v1(388.112,1002.64)
  Bottom Layer w0.25: v1(381.533,1004.256) 381.533,1002.65 384.033,1000.15 391.414,1000.15 392.024,1000.76 392.024,1001.776 391.16,1002.64 v1(388.112,1002.64)
NetR124_2: R124.2 U9.97 | length 35
  Top Layer w0.25: R124.2@382.5,1027.5 381.045,1027.5 380.09,1026.545 380.09,1008.938 382.575,1006.453 v1(382.575,1004.316) ; v1(388.747,1000.963) 388.75,1000.966 U9.97@388.75,1001.8
  Bottom Layer w0.25: v1(382.575,1004.316) 382.575,1003.452 385.064,1000.963 v1(388.747,1000.963)
NetR125_2: R125.2 U9.96 | length 27.5
  Top Layer w0.25: U9.96@389.4,1001.8 389.4,1010.343 388.087,1011.657 388.087,1026.459 389.128,1027.5 R125.2@390,1027.5
NetR126_2: R126.2 U9.95 | length 30.8
  Top Layer w0.25: U9.95@390.05,1001.8 390.05,1004.646 392.659,1007.255 392.659,1026.16 393.999,1027.5 R126.2@397.5,1027.5
NetR127_2: R127.2 U9.93 | length 62.7
  Top Layer w0.25: v1(343.764,1016) 343.764,1017.094 344.17,1017.5 R127.2@345,1017.5 ; v1(391.301,1001) 391.35,1001.049 U9.93@391.35,1001.8
  Bottom Layer w0.25: v1(343.764,1016) 350.14,1009.624 381.044,1009.624 384.879,1005.789 384.879,1004.741 384.556,1004.418 ; v1(391.301,1001) 390.601,1001.7 385.115,1001.7 383.515,1003.3 ; 383.515,1003.3 383.794,1004.138 384.277,1004.138 384.556,1004.418 ; 383.515,1003.3 383.515,1004.138 383.794,1004.418 384.556,1004.418
NetR128_2: R128.2 U9.90 | length 66.1
  Top Layer w0.25: v1(350.8,1017.5) R128.2@352.5,1017.5 ; U9.90@393.3,1001.8 v1(393.3,1002.64)
  Bottom Layer w0.25: v1(350.8,1017.5) 350.8,1014.043 353.096,1011.747 374.396,1011.747 374.988,1011.155 396.344,1011.155 398.056,1009.444 398.056,1003.719 396.977,1002.64 v1(393.3,1002.64)
NetR129_2: R129.2 U9.34 | length 82.8
  Top Layer w0.25: U9.34@395.25,968.85 v1(395.25,981.812) ; v1(438.404,965.911) 438.404,961.5 R129.2@439.25,961.5
  Bottom Layer w0.25: v1(395.25,981.812) 401.53,981.812 401.625,981.717 402.819,981.717 404.837,983.735 426.092,983.735 436.016,973.811 440.944,973.811 441.63,973.125 ; v1(438.404,965.911) 441.63,969.137 ; 441.63,969.137 442.137,969.644 442.137,972.618 441.63,973.125 ; 441.63,969.137 441.63,973.125
NetR130_2: R130.2 U9.33 | length 45.7
  Top Layer w0.25: U9.33@394.6,968.85 394.6,965.752 395.71,964.641 v1(402.387,964.641) ; v1(430.359,964.641) R130.2@433.5,961.5
  Bottom Layer w0.25: v1(402.387,964.641) v1(430.359,964.641) 432.283,964.641
NetR131_2: R131.2 U9.89 | length 64.6
  Top Layer w0.25: v1(358.47,1017.5) R131.2@360,1017.5 ; U9.89@393.95,1001.8 393.95,1000.967 v1(395.656,999.261)
  Bottom Layer w0.25: v1(358.47,1017.5) 358.47,1014.755 359.664,1013.562 397.332,1013.562 399.221,1011.672 399.221,1000.77 397.713,999.261 v1(395.656,999.261)
NetR132_2: R132.2 U9.88 | length 44.8
  Top Layer w0.25: R132.2@367.5,1017.5 368.63,1017.5 368.63,1011.017 v1(369.083,1010.564) ; v1(394.546,1003.576) 394.6,1003.522 U9.88@394.6,1001.8
  Bottom Layer w0.25: v1(369.083,1010.564) 369.519,1010.128 395.356,1010.128 397.048,1008.436 397.048,1006.078 v1(394.546,1003.576)
NetR133_2: R133.2 U9.87 | length 105.3
  Top Layer w0.25: R133.2@345,1027.5 345.008,1027.5 345.008,1031.646 342.595,1034.059 342.595,1042.416 344.348,1044.169 347.472,1044.169 349.072,1042.568 349.072,1032.84 356.413,1025.5 v1(356.413,1022.426) ; v1(393.344,1022.426) 393.344,1005.764 395.25,1003.858 U9.87@395.25,1001.8
  Bottom Layer w0.25: v1(356.413,1022.426) v1(393.344,1022.426)
NetR134_2: R134.2 U9.86 | length 75.4
  Top Layer w0.25: v1(349.326,1027.5) R134.2@352.5,1027.5 ; U9.86@395.9,1001.8 395.9,1003.122 v1(396.408,1003.63)
  Bottom Layer w0.25: v1(349.326,1027.5) 349.326,1013.053 351.136,1011.243 373.888,1011.243 374.499,1010.632 395.864,1010.632 397.552,1008.944 397.552,1004.774 v1(396.408,1003.63)
NetR135_2: R135.2 U9.85 | length 79.3
  Top Layer w0.25: 358.781,1027.5 R135.2@360,1027.5 ; v1(396.55,1000.968) U9.85@396.55,1001.8
  Bottom Layer w0.25: 358.775,1027.506 355.041,1027.506 355.035,1027.5 ; 358.781,1027.5 355.035,1027.5 ; v1(396.55,1000.968) 398.56,1002.979 398.56,1009.96 395.669,1012.85 355.905,1012.85 353.771,1014.984 353.771,1026.236 355.035,1027.5
NetR136_2: R136.2 U9.84 | length 62.8
  Top Layer w0.25: v1(366.268,1027.506) 366.274,1027.5 R136.2@367.5,1027.5 ; U9.84@397.2,1001.8 397.2,1004.316 394.572,1006.945 394.572,1023.838 396.24,1025.507 397.365,1025.507 v1(398.856,1026.998)
  Bottom Layer w0.25: v1(366.268,1027.506) 398.348,1027.506 v1(398.856,1026.998)
NetR137_2: R137.2 U9.81 | length 41.1
  Top Layer w0.25: U9.81@399.15,1001.8 399.15,1002.298 436.615,1002.298 437.95,1003.633 R137.2@437.95,1004.85
NetR138_2: R138.2 U9.80 | length 38.1
  Top Layer w0.25: v1(402.133,998.276) 402.409,998 U9.80@402.95,998 ; v1(437.947,998.626) 437.95,998.63 R138.2@437.95,999.85
  Bottom Layer w0.25: v1(402.133,998.276) 437.596,998.276 v1(437.947,998.626)
NetR139_2: R139.2 U9.79 | length 37.5
  Top Layer w0.25: U9.79@402.95,997.35 v1(404.978,997.35) ; R139.2@437.95,994.85 v1(437.95,997.35)
  Bottom Layer w0.25: v1(404.978,997.35) v1(437.95,997.35)
NetR140_2: R140.2 U9.78 | length 75.5
  Top Layer w0.25: v1(401.117,996.7) U9.78@402.95,996.7 ; R140.2@437.95,989.85 v1(437.95,992.53)
  Bottom Layer w0.25: v1(401.117,996.7) 401.117,994.74 402.808,993.049 406.462,993.049 406.774,992.736 ; 406.774,992.736 406.98,992.53 v1(437.95,992.53) 437.744,992.736 406.774,992.736
NetR141_2: R141.2 U9.76 | length 51.7
  Top Layer w0.25: U9.76@402.95,995.4 400.711,995.4 400.431,995.68 400.431,999.007 401.059,999.636 426.314,999.636 437.95,988 R141.2@437.95,984.85
NetR142_2: R142.2 U9.75 | length 44.2
  Top Layer w0.25: U9.75@402.95,994.75 403.774,994.75 v1(403.892,994.632) ; v1(428.403,994.632) 428.403,991.587 437.95,982.04 R142.2@437.95,979.85
  Bottom Layer w0.25: v1(403.892,994.632) v1(428.403,994.632)
NetR143_2: R143.2 U9.74 | length 86.8
  Top Layer w0.25: v1(401.117,993.597) 401.62,994.1 U9.74@402.95,994.1 ; R143.2@437.95,974.85 437.95,976.808 439.166,978.024 v1(439.166,991.337)
  Bottom Layer w0.25: v1(401.117,993.597) 402.169,992.545 405.957,992.545 406.27,992.232 ; v1(439.166,991.337) 438.658,991.845 ; 439.166,991.845 438.658,991.845 ; 406.27,992.232 406.658,991.845 434.391,991.845 ; 406.27,992.232 434.003,992.232 434.391,991.845 ; 434.391,991.845 438.658,991.845
NetR144_2: R144.2 U9.73 | length 45.6
  Top Layer w0.25: U9.73@402.95,993.45 404.272,993.45 v1(404.749,993.927) ; v1(415.115,993.445) 437.95,970.61 R144.2@437.95,969.85
  Bottom Layer w0.25: v1(404.749,993.927) 405.123,993.553 415.007,993.553 v1(415.115,993.445)
NetR145_2: R145.2 U9.70 | length 105.9
  Top Layer w0.25: v1(400.62,989.478) 400.62,990.8 401.32,991.5 U9.70@402.95,991.5 ; v1(446.888,992.53) 446.888,1002.669 447.95,1003.732 R145.2@447.95,1004.85
  Bottom Layer w0.25: v1(400.62,989.478) 402.332,989.478 403.476,990.623 405.225,990.623 405.869,989.979 ; v1(446.888,992.53) 446.888,990.992 445.875,989.979 ; 405.869,989.979 406.198,989.649 445.545,989.649 445.875,989.979 ; 405.869,989.979 445.875,989.979
NetR146_2: R146.2 U9.69 | length 93
  Top Layer w0.25: U9.69@402.95,990.85 404.262,990.85 v1(404.774,991.362) ; R146.2@447.95,999.85 447.95,996.213 v1(447.954,996.209)
  Bottom Layer w0.25: v1(404.774,991.362) 405.212,991.362 406.091,990.483 ; v1(447.954,996.209) 445.701,993.955 445.701,990.817 445.367,990.483 ; 406.091,990.483 406.421,990.154 445.037,990.154 445.367,990.483 ; 406.091,990.483 445.367,990.483
NetR147_2: R147.2 U9.68 | length 92.2
  Top Layer w0.25: U9.68@402.95,990.2 404.285,990.2 v1(404.546,989.94) ; v1(447.95,992.607) R147.2@447.95,994.85
  Bottom Layer w0.25: v1(447.95,992.607) 447.95,991.002 446.151,989.203 ; 405.282,989.203 405.34,989.145 446.093,989.145 446.151,989.203 ; 405.282,989.203 v1(404.546,989.94) 404.546,989.533 404.876,989.203 405.282,989.203 ; 405.282,989.203 446.151,989.203
NetR148_2: R148.2 U9.66 | length 86.2
  Top Layer w0.25: v1(401.93,990.544) 401.93,989.306 402.336,988.9 U9.66@402.95,988.9 ; v1(444.805,991.768) 445.821,990.752 447.95,990.752 R148.2@447.95,989.85
  Bottom Layer w0.25: v1(401.93,990.544) 403.427,992.041 405.453,992.041 405.777,991.718 ; v1(444.805,991.768) 444.086,991.049 ; 405.777,991.718 406.445,991.049 434.323,991.049 ; 405.777,991.718 433.654,991.718 434.323,991.049 ; 434.323,991.049 438.095,991.049 ; 438.095,991.049 444.086,991.049 ; 438.095,991.049 438.487,990.658 443.694,990.658 444.086,991.049
NetR149_2: R149.2 U9.65 | length 47.7
  Top Layer w0.25: U9.65@402.95,988.25 v1(404.774,988.25) ; v1(447.446,983.615) 447.45,983.619 R149.2@447.45,984.85
  Bottom Layer w0.25: v1(404.774,988.25) 434.887,988.25 439.024,984.112 446.949,984.112 v1(447.446,983.615)
NetR150_2: R150.2 U9.64 | length 50.9
  Top Layer w0.25: 402.136,987.6 U9.64@402.95,987.6 ; R150.2@447.45,979.85 v1(447.45,981.1)
  Bottom Layer w0.25: 402.133,987.603 402.285,987.755 402.291,987.755 ; 402.136,987.6 402.291,987.755 ; v1(447.45,981.1) 443.687,981.1 443.332,981.456 443.332,982.243 441.967,983.608 433.051,983.608 429.603,987.057 404.787,987.057 404.089,987.755 402.291,987.755
NetR151_2: R151.2 U9.63 | length 51.2
  Top Layer w0.25: U9.63@402.95,986.95 v1(403.776,986.95) ; v1(447.446,973.633) 447.45,973.636 R151.2@447.45,974.85
  Bottom Layer w0.25: v1(403.776,986.95) 405.74,984.987 427.787,984.987 433.146,979.627 441.452,979.627 v1(447.446,973.633)
NetR152_2: R152.2 U9.62 | length 71.7
  Top Layer w0.25: v1(401.32,985.838) 401.782,986.3 U9.62@402.95,986.3 ; v1(445.491,969.543) 447.45,969.543 R152.2@447.45,969.85
  Bottom Layer w0.25: v1(401.32,985.838) 402.918,984.239 426.426,984.239 433.451,977.214 ; v1(445.491,969.543) 445.491,973.328 ; 433.451,977.214 435.889,974.776 444.043,974.776 445.491,973.328 ; 433.451,977.214 443.052,977.214 445.491,974.776 445.491,973.328
NetR153_2: R153.2 U9.60 | length 46
  Top Layer w0.25: U9.60@402.95,985 405.623,985 409.6,981.023 409.6,944.626 409.324,944.35 R153.2@408.45,944.35
NetR154_2: R154.2 U9.59 | length 53
  Top Layer w0.25: U9.59@402.95,984.35 405.347,984.35 407.031,982.666 407.031,943.843 407.416,943.458 414.753,943.458 415.646,944.35 R154.2@415.95,944.35
NetR155_2: R155.2 U9.58 | length 63.6
  Top Layer w0.25: v1(401.117,983.7) U9.58@402.95,983.7 ; v1(403.911,985.698) 411.937,985.698 420.624,977.011 420.624,945.366 421.64,944.35 R155.2@423.45,944.35
  Bottom Layer w0.25: v1(401.117,983.7) 400.641,984.176 400.641,986.467 400.71,986.536 403.073,986.536 v1(403.911,985.698)
NetR156_2: R156.2 U9.57 | length 85.4
  Top Layer w0.25: U9.57@402.95,983.05 405.276,983.05 ; v1(427.482,978.662) 429.387,976.757 429.387,951.967 432.079,949.274 432.079,944.626 431.803,944.35 R156.2@430.95,944.35
  Bottom Layer w0.25: 405.276,983.05 425.654,983.05 ; 405.282,983.056 425.648,983.056 425.654,983.05 ; v1(427.482,978.662) 427.482,981.222 425.654,983.05
NetR157_2: R157.2 U9.55 | length 50.2
  Top Layer w0.25: U9.55@402.95,981.75 405.42,981.75 406.527,980.643 406.527,936.739 407.416,935.85 R157.2@408.45,935.85
NetR158_2: R158.2 U9.54 | length 56.8
  Top Layer w0.25: v1(401.117,981.075) 401.142,981.1 U9.54@402.95,981.1 ; v1(411.569,935.85) R158.2@415.95,935.85
  Bottom Layer w0.25: v1(401.117,981.075) 399.934,979.892 399.934,973.417 400.431,972.92 400.431,946.988 v1(411.569,935.85)
NetR159_2: R159.2 U9.53 | length 62.2
  Top Layer w0.25: U9.53@402.95,980.45 405.73,980.45 v1(405.74,980.44) ; v1(420.497,935.85) R159.2@423.45,935.85
  Bottom Layer w0.25: v1(405.74,980.44) 406.324,979.856 406.324,966.47 406.07,966.216 402.717,966.216 401.701,965.2 401.701,954.646 v1(420.497,935.85)
NetR160_2: R160.2 U9.52 | length 72.5
  Top Layer w0.25: 402.178,979.8 U9.52@402.95,979.8 ; v1(428.676,975.081) 428.676,936.942 429.768,935.85 R160.2@430.95,935.85
  Bottom Layer w0.25: 402.173,979.805 402.886,979.805 ; 402.178,979.8 402.881,979.8 402.886,979.805 ; v1(428.676,975.081) 421.889,981.867 404.948,981.867 402.886,979.805
NetR161_2: R161.2 U9.50 | length 53.9
  Top Layer w0.25: v1(400.936,978.5) U9.50@402.95,978.5 ; v1(405.638,966.953) 405.638,932.865 408.153,930.35 R161.2@408.45,930.35
  Bottom Layer w0.25: v1(400.936,978.5) 400.438,978.002 400.438,973.921 401.269,973.089 401.269,971.321 v1(405.638,966.953)
NetR162_2: R162.2 U9.49 | length 64.7
  Top Layer w0.25: U9.49@402.95,977.85 403.758,977.85 404.774,976.833 404.774,927.608 405.867,926.516 410.032,926.516 413.866,930.35 R162.2@415.95,930.35
NetR163_2: R163.2 U9.47 | length 76
  Top Layer w0.25: U9.47@402.95,976.55 403.356,976.55 404.074,975.832 404.074,923.516 405.646,921.944 412.852,921.944 418.258,927.35 R163.2@423.45,927.35
NetR164_2: R164.2 U9.44 | length 91.9
  Top Layer w0.25: v1(401.301,974.6) U9.44@402.95,974.6 ; v1(426.085,981.111) 426.085,937.514 432.079,931.52 432.079,927.608 R164.2@430.95,927.35
  Bottom Layer w0.25: v1(401.301,974.6) 401.301,977.704 401.93,978.332 ; v1(426.085,981.111) 424.825,982.371 404.515,982.371 403.357,981.213 402.398,981.213 401.459,980.274 401.459,979.145 ; 401.459,979.145 401.93,978.332 ; 401.459,979.145 401.93,978.674 401.93,978.332
NetR165_2: R165.2 U9.40 | length 55.4
  Top Layer w0.25: U9.40@399.15,968.85 399.15,968.629 399.44,968.629 403.066,965.004 403.066,921.152 404.368,919.85 R165.2@408.45,919.85
NetR166_2: R166.2 U9.39 | length 61
  Top Layer w0.25: U9.39@398.5,968.85 398.5,969.311 v1(399.034,969.845) ; v1(414.731,919.85) R166.2@415.95,919.85
  Bottom Layer w0.25: v1(399.034,969.845) 399.034,946.887 400.533,945.388 400.533,941.045 407.924,933.653 407.924,923.138 411.212,919.85 v1(414.731,919.85)
NetR167_2: R167.2 U9.38 | length 75
  Top Layer w0.25: U9.38@397.85,968.85 397.85,970.28 398.434,970.864 400.558,970.864 403.57,967.852 403.57,922.42 404.554,921.436 417.449,921.436 419.035,919.85 R167.2@423.45,919.85
NetR168_2: R168.2 U9.37 | length 100.1
  Top Layer w0.25: U9.37@397.2,968.85 397.2,971.824 397.764,972.388 v1(401.98,972.388) ; v1(424.713,977.57) 424.713,928.827 428.103,925.438 428.103,921.512 429.765,919.85 R168.2@430.95,919.85
  Bottom Layer w0.25: v1(401.98,972.388) 404.876,975.284 404.876,980.846 405.181,981.151 421.132,981.151 v1(424.713,977.57)
NetR171_2: R171.2 U11.5 | length 9.4
  Top Layer w0.25: R171.2@315.5,897.5 315.5,896.62 315.847,896.273 315.976,896.273 317.754,898.051 317.754,900.214 U11.5@320,902.46
NetR172_2: R172.2 U11.3 | length 6.2
  Top Layer w0.25: R172.2@315.5,905 315.5,906.085 316.955,907.54 U11.3@320,907.54
NetR173_1: R173.1 U10.4 | length 8.2
  Top Layer w0.25: U10.4@293,930 293,927.608 294.016,926.592 297.5,926.592 R173.1@297.5,927.5
NetR174_1: R174.1 U11.4 | length 18.7
  Top Layer w0.25: U11.4@320,905 323,902 R174.1@323,887.5
NetR175_1: R175.1 U12.8 | length 50.4
  Top Layer w0.25: v1(300.5,936.269) R175.1@300.5,937.5
  Bottom Layer w0.25: v1(300.5,936.269) 314.782,936.269 324.51,926.541 328.6,926.541 329.108,926.033 329.108,919.429 328.6,918.921 320.999,918.921 U12.8@320,919.92
NetR176_1: R176.1 U12.6 | length 28.2
  Top Layer w0.25: v1(297.5,931.266) R176.1@297.5,932.5
  Bottom Layer w0.25: v1(297.5,931.266) 297.5,928.101 300.601,925 U12.6@320,925
NetR177_1: R177.1 R178.2 U13.17 | length 154.3
  Top Layer w0.25: R178.2@472.5,1037.5 R177.1@477.5,1037.5 477.5,1011.91 477.289,1011.699 477.289,1010.547 477.408,1010.428 477.408,988.941 477.495,988.854 477.495,902.505 U13.17@487.5,892.5
NetR179_1: R179.1 R180.2 U14.17 | length 92.9
  Top Layer w0.25: v1(455,1036.259) R180.2@455,1037.5 ; v1(465.5,1036.269) R179.1@465.5,1037.5 465.5,1040.384 466.516,1041.4 487.426,1041.4 489.001,1039.825 489.001,1009.904 487.807,1008.71 487.096,1008.71 486.512,1008.126 486.512,993.488 U14.17@487.5,992.5
  Bottom Layer w0.25: v1(455,1036.259) 459.003,1032.256 461.487,1032.256 v1(465.5,1036.269)
NetR185_2: R185.2 R198.2 U16.15 | length 65.4
  Top Layer w0.25: v1(373.863,882.167) 371.577,879.881 371.577,873.194 371.671,873.1 371.671,864.216 373.888,862 374.4,862 R185.2@374.4,861.7 ; v1(387.4,878.002) R198.2@387.4,879.2 ; v1(399.898,878.002) 405.003,872.896 405.003,870.941 404.622,870.56 403.646,870.56 403.155,871.05 U16.15@400.95,871.05
  Bottom Layer w0.25: v1(373.863,882.167) 375.564,882.167 379.73,878.002 v1(387.4,878.002) v1(399.898,878.002)